# Altium PCB Digital_Encoder_Layout_V2.1.PcbDoc
Units mil, origin at the board's own origin, x right, y up, seen from the top; angles counter-clockwise.
Board outline 1220.47 x 1233.89 mil, 2 copper layers (Top Layer, Bottom Layer); 14 components, 11 nets, 51 pads, 14 vias.
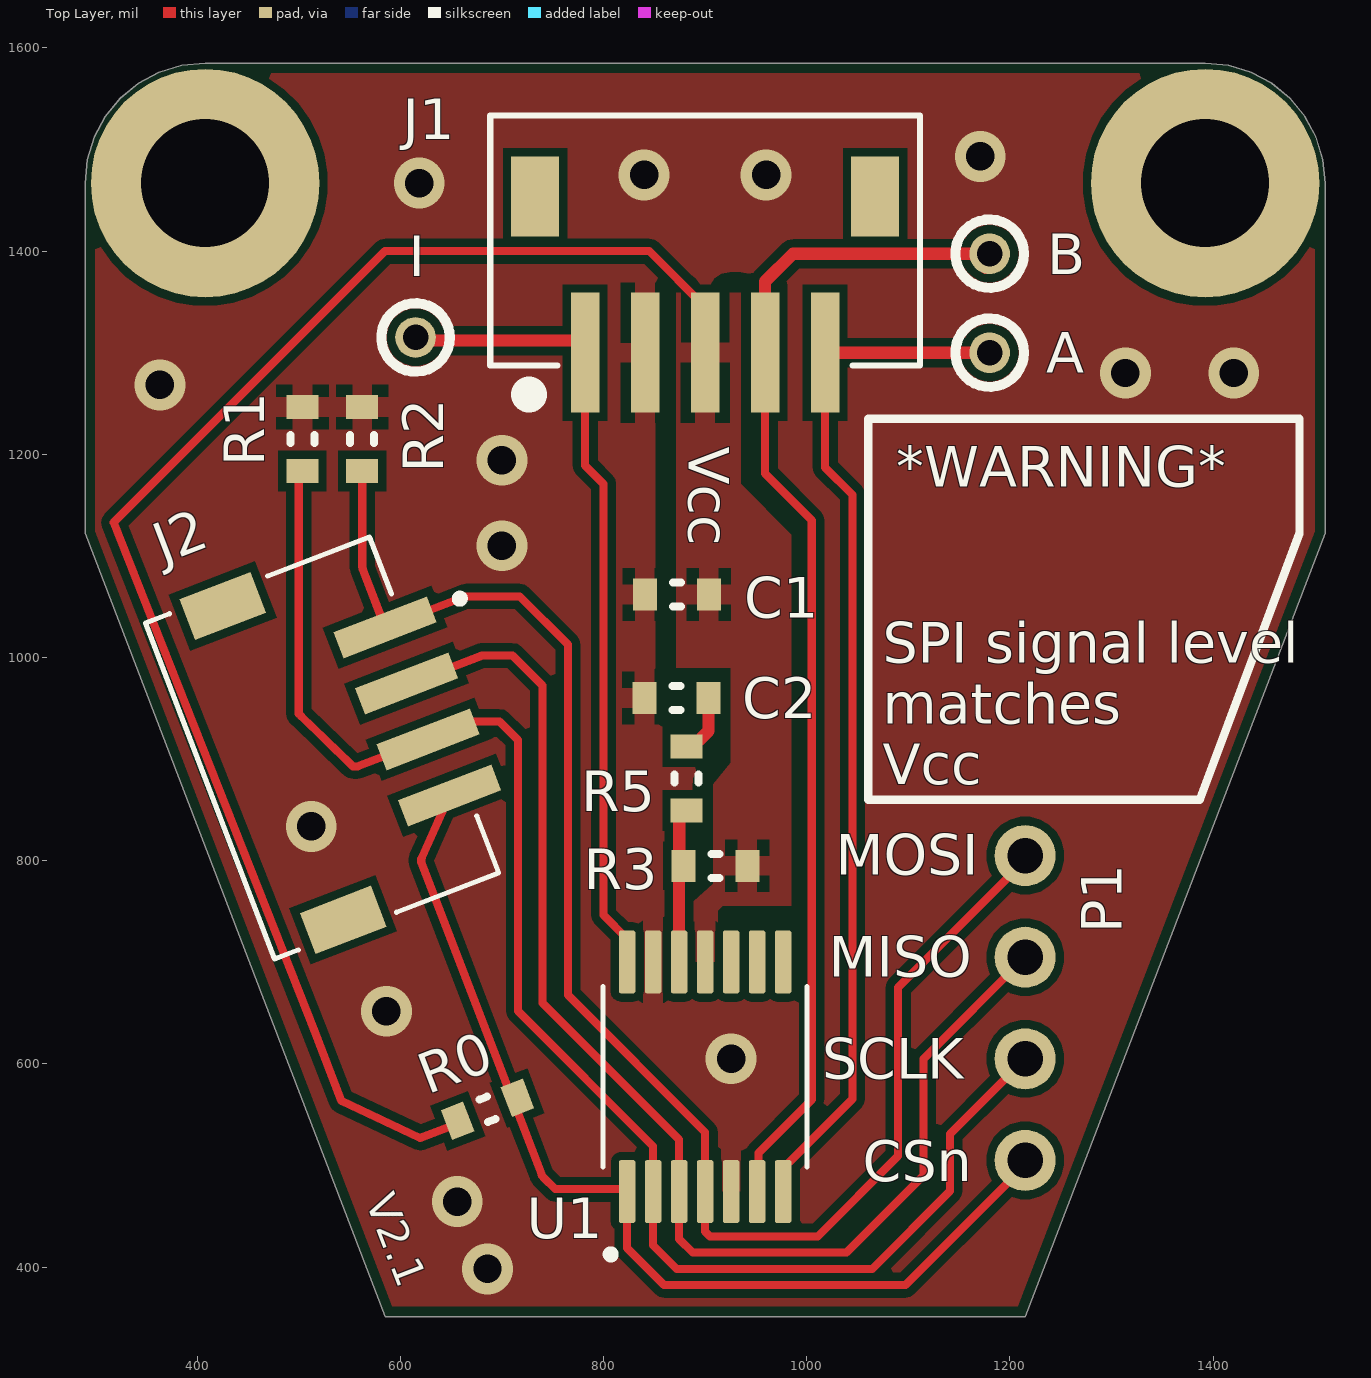
[diagram p0: Top Layer view]
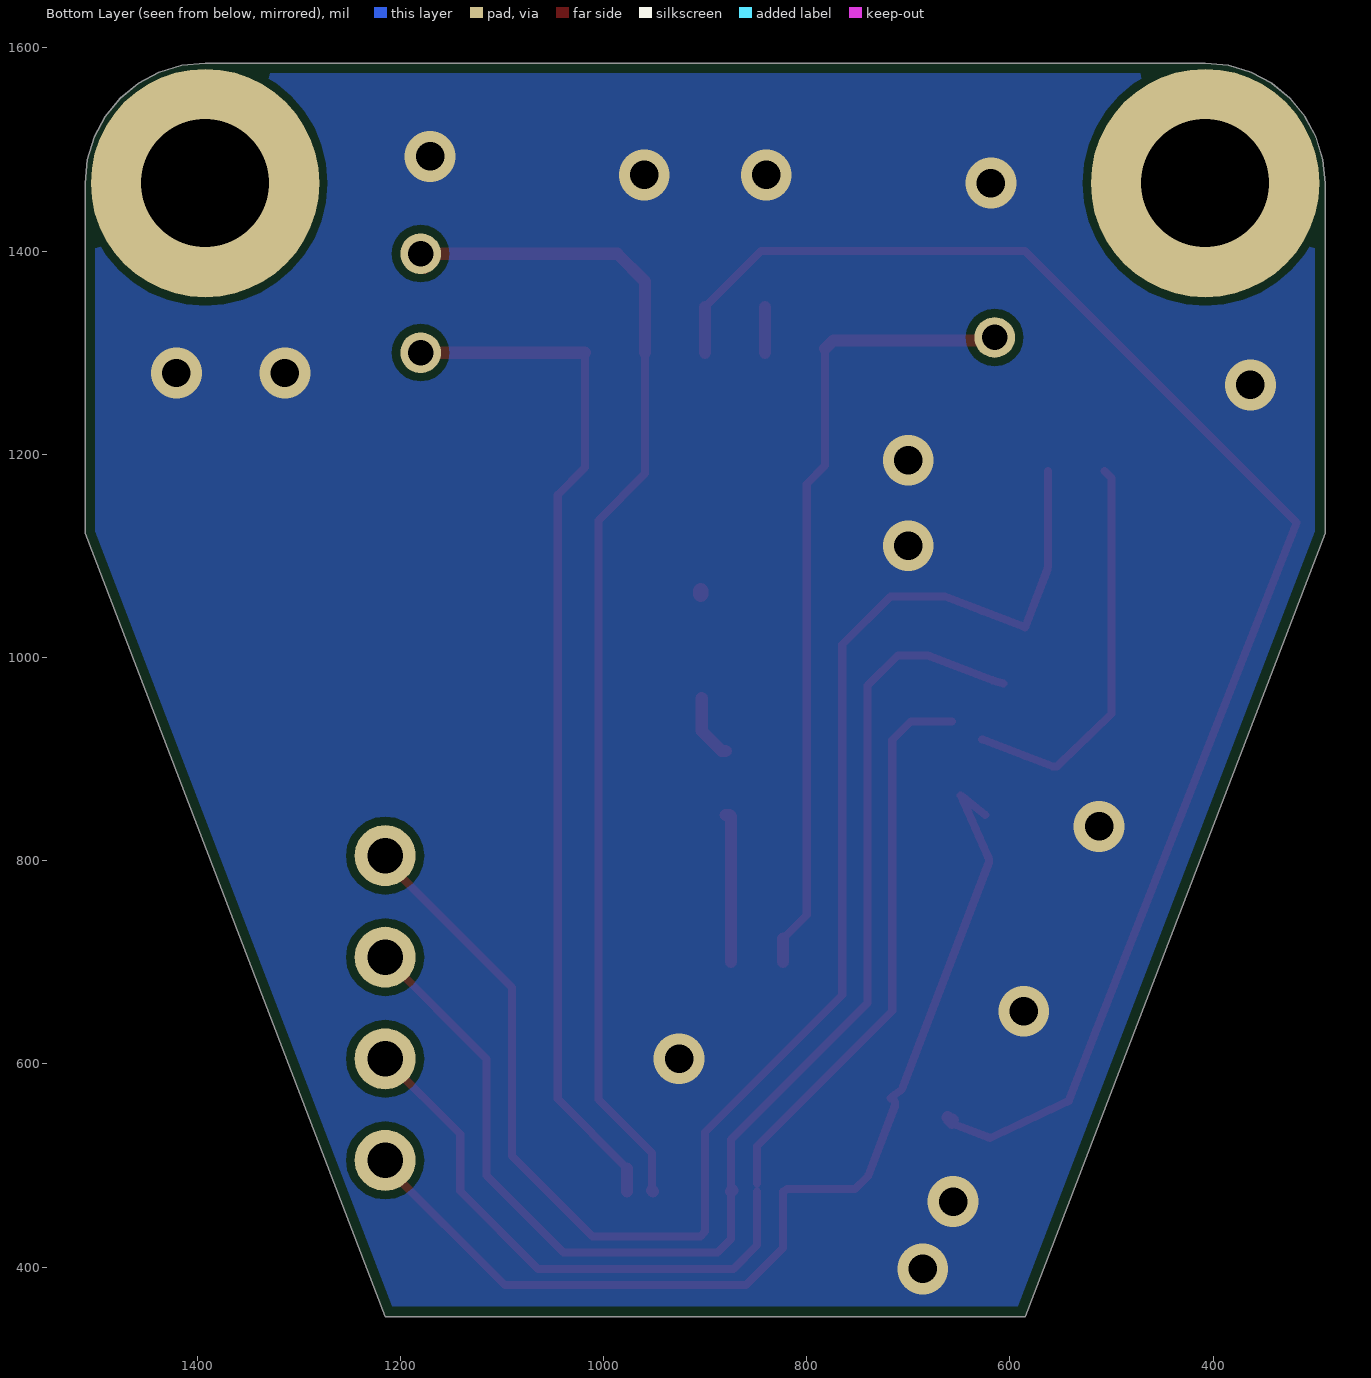
[diagram p1: Bottom Layer view, seen from below]

## Layer stack, top to bottom
Top Solder: solder mask 0.4, Solder Resist, Dk 3.5
Top Layer: signal copper 1.4
Dielectric 1: dielectric 12.6, FR-4, Dk 4.8
Bottom Layer: signal copper 1.4
Bottom Solder: solder mask 0.4, Solder Resist, Dk 3.5

## Board outline
407.87,1585 384.83,1582.73 362.68,1576.01 342.26,1565.09 324.36,1550.41 309.67,1532.51 298.75,1512.09 292.03,1489.93 289.76,1466.89 289.76,1122.31 585.04,351.11 1214.96,351.11 1510.24,1122.31 1510.24,1466.89 1507.97,1489.93 1501.25,1512.09 1490.33,1532.51 1475.64,1550.41 1457.74,1565.09 1437.32,1576.01 1415.17,1582.73 1392.13,1585

## Design rules (kind name [scope] priority, off if disabled: settings)
BoardOutlineClearance [All] p1: gap=10 ignorepadtopadclearanceinfootprint=FALSE
Clearance Clearance_1 [InNet('5V_3v3_Sel') vs InNet('GND')] p1: gap=8 ignorepadtopadclearanceinfootprint=TRUE except(10: Arc-Text Track-Text SMDPad-Text THPad-Text Via-Text Fill-Text Poly-Text Region-Text Text-Text; 20: Fill-Fill Fill-Poly Fill-Region Poly-Poly Poly-Region Region-Region)
Clearance "Clearance Bottom Layer" [OnLayer('Bottom Layer')] p2: gap=8 ignorepadtopadclearanceinfootprint=TRUE except(10: Arc-Text Track-Text SMDPad-Text THPad-Text Via-Text Fill-Text Poly-Text Region-Text Text-Text)
Clearance "Clearance Top Layer" [OnLayer('Top Layer')] p3: gap=8 ignorepadtopadclearanceinfootprint=TRUE except(10: Arc-Text Track-Text SMDPad-Text THPad-Text Via-Text Fill-Text Poly-Text Region-Text Text-Text)
HoleSize [All] p1: absolutevalues=TRUE maxlimit=248.03 minlimit=7.87 maxpercent=80.000 minpercent=20.000
MinimumAnnularRing [All] p1: minimumring=3
MinimumSolderMaskSliver [All] p1: minsoldermaskwidth=3.94
PolygonConnect PolygonConnect_5 [All vs IsNamedPolygon('3V3_L01_P007')] p1: thpad.connectstyle=Direct thpad.reliefconductorwidth=10 thpad.reliefentries=4 thpad.polygonreliefangle="90 Angle" thpad.airgapwidth=10 smdpad.connectstyle=Direct smdpad.reliefconductorwidth=10 smdpad.reliefentries=4 smdpad.polygonreliefangle="90 Angle" smdpad.airgapwidth=10 via.connectstyle=Relief via.reliefconductorwidth=10 via.reliefentries=4 via.polygonreliefangle="90 Angle" via.airgapwidth=10
PolygonConnect PolygonConnect_4 [All vs IsNamedPolygon('3V3_L01_P006')] p2: thpad.connectstyle=Relief thpad.reliefconductorwidth=10 thpad.reliefentries=4 thpad.polygonreliefangle="90 Angle" thpad.airgapwidth=10 smdpad.connectstyle=Direct smdpad.reliefconductorwidth=10 smdpad.reliefentries=4 smdpad.polygonreliefangle="90 Angle" smdpad.airgapwidth=10 via.connectstyle=Relief via.reliefconductorwidth=10 via.reliefentries=4 via.polygonreliefangle="90 Angle" via.airgapwidth=10
PolygonConnect PolygonConnect_3 [All vs IsNamedPolygon('3V3_L01_P005')] p3: thpad.connectstyle=Relief thpad.reliefconductorwidth=10 thpad.reliefentries=4 thpad.polygonreliefangle="90 Angle" thpad.airgapwidth=10 smdpad.connectstyle=Direct smdpad.reliefconductorwidth=10 smdpad.reliefentries=4 smdpad.polygonreliefangle="90 Angle" smdpad.airgapwidth=10 via.connectstyle=Relief via.reliefconductorwidth=10 via.reliefentries=4 via.polygonreliefangle="90 Angle" via.airgapwidth=10
PolygonConnect PolygonConnect_2 [All vs IsNamedPolygon('3V3_L01_P003')] p4: connectstyle=Direct reliefconductorwidth=10 reliefentries=4 polygonreliefangle="90 Angle" airgapwidth=10
PolygonConnect [All vs IsNamedPolygon('3V3_L01_P002')] p5: thpad.connectstyle=Direct thpad.reliefconductorwidth=10 thpad.reliefentries=4 thpad.polygonreliefangle="90 Angle" thpad.airgapwidth=10 smdpad.connectstyle=Direct smdpad.reliefconductorwidth=10 smdpad.reliefentries=4 smdpad.polygonreliefangle="90 Angle" smdpad.airgapwidth=10 via.connectstyle=Relief via.reliefconductorwidth=10 via.reliefentries=4 via.polygonreliefangle="90 Angle" via.airgapwidth=10
PolygonConnect PolygonConnect_1 [All] p6: thpad.connectstyle=Relief thpad.reliefconductorwidth=20 thpad.reliefentries=4 thpad.polygonreliefangle="90 Angle" thpad.airgapwidth=10 smdpad.connectstyle=Relief smdpad.reliefconductorwidth=20 smdpad.reliefentries=4 smdpad.polygonreliefangle="90 Angle" smdpad.airgapwidth=10 via.connectstyle=Direct via.reliefconductorwidth=20 via.reliefentries=4 via.polygonreliefangle="90 Angle" via.airgapwidth=10
RoomDefinition Digital_Encoder_Breakout [InComponentClass('Digital_Encoder_Breakout')] p1: confinementstyle=ConfineIn formatcopy=TRUE lockcomponents=FALSE outline 0,0 2000,0 2000,1960 0,1960
RoutingCorners [All] p1: cornerstyle=Round minsetback=100 maxsetback=100
RoutingVias [All] p1: holewidth=19.68 width=39.37 viastyle="Through Hole" minholewidth=7.87 minwidth=17.72 maxholewidth=39.37 maxwidth=78.74
SilkToSilkClearance [All] p1: silktosilkclearance=3.94
SilkToSolderMaskClearance [IsPad] p1: minsilkscreentomaskgap=3.94 clearancetoexposedcopper=TRUE
SolderMaskExpansion [All] p1: expansion=4 istentingtop=FALSE
Width [All] p1: maxlimit=100 minlimit=3.5 preferedwidth=15
25 further rules are at their usual default settings.

## Components (designator, comment, footprint, x,y, rotation, side; value= is the part's Value field where it differs from the comment)
A "Test Point (Via)" TP 1180,1300 r0 top
B "Test Point (Via)" TP 1180,1397.43 r90 top
C1 "0.10uF" 0603#1 872.13,1061.9 r0 top
C2 "1.0uF" 0603#1 871.81,960 r180 top
I "Test Point (Via)" TP 615,1315 r90 top
J1 "S5B-ZR-SM4A-TF (LF) (SN)" JST_S5B-ZR-SM4A-TF 781.89,1300 r0 top
J2 "S4B-ZR-SM4A-TF(LF)(SN)" JST_S4B-ZR-SM4A-TF(LF)(SN) 616.75,946.95 r291 top
P1 "POGO 4 PIN THRU" "POGO 4 PIN THRU" 1215,505 r90 top
R0 "4.7k" 0603#2 685.8,555.25 r201 top
R1 "4.7k" 0603#2 503.57,1215 r90 top
R2 "4.7k" 0603#2 562.47,1215 r90 top
R3 "JUMPER" 0603#1 910,795 r180 top value=0
R5 "JUMPER" 0603#1 881.89,880.89 r90 top value=0
U1 "AS5047U" AS5047U 900,587.33 r90 top

## Footprints (in the part's own frame and the unit in brackets; to place one, negate y for a bottom-side part, rotate by r counter-clockwise, add the part's x,y. Pads: shape width x height; smd on the part's side, far side on the other; paste and mask are expansions set on the pad)
0603#1 [mm] "Chip Resistor, 2-Leads, Body 1.60x0.80mm, IPC High Density"
  rect 0.6x0.8 smd mask+0.1: 1(-0.8,0) 2(0.8,0)
  silkscreen extent -0.1,-0.3 0.1,0.3, body extent -0.8,-0.4 0.8,0.4, height 0.6
0603#2 [mm] "Chip Resistor, 2-Leads, Body 1.60x0.80mm, IPC High Density"
  rect 0.6x0.8 smd: 1(-0.8,0) 2(0.8,0)
  silkscreen extent -0.1,-0.3 0.1,0.3, body extent -0.8,-0.4 0.8,0.4, height 0.6
AS5047U [mm]
  rrect25% 1.57x0.41 smd: 1(-2.87,1.95) 2(-2.87,1.3) 3(-2.87,0.65) 4(-2.87,0) 5(-2.87,-0.65) 6(-2.87,-1.3) 7(-2.87,-1.95) 8(2.87,-1.95) 9(2.87,-1.3) 10(2.87,-0.65) 11(2.87,0) 12(2.87,0.65) 13(2.87,1.3) 14(2.87,1.95)
  silkscreen extent -4.54,-2.55 2.25,2.55
JST_S4B-ZR-SM4A-TF(LF)(SN) [mm]
  rect 0.7x2.5 smd: 1(-2.25,0) 2(-0.75,0) 3(0.75,0) 4(2.25,0)
  rect 1.1x1.9 smd: S1(-4.2,-3.6) S2(4.2,-3.6)
  silkscreen extent -4.5,-5.55 4.5,2.1, body extent -4.53,-5.59 4.47,0.91, height 3.7
JST_S5B-ZR-SM4A-TF [mil]
  rect 28x118 smd paste+0: 1(0,0) 2(59.06,0) 3(118.11,0) 4(177.17,0) 5(236.22,0)
  rect 47x79 smd: 6(-49.21,153.62) 7(285.43,153.62)
  silkscreen extent -93,-41 330,233, body extent -88,-28 325,228, height 146
"POGO 4 PIN THRU" [mil]
  round 60 hole 35.04: 1(0,0) 2(100,0) 3(200,0) 4(300,0)
TP [mil] "Test point (40mil Standard)"
  round 40 hole 25: 1(0,0)

## Part data
C1: library part "CAP 0.10uF 16V", "CAP CER 0.10UF 16V X5R 0603/0805", Operating Temperature="-55°C ~ 85°C", Package=0603/0805, Rating=16V, Temperature Coefficient=X5R, Tolerance=10%
C2: library part "CAP 1.0uF 16V", "CAP CER 1.0UF 16V X5R 0603/0805", Operating Temperature="-55°C ~ 85°C", Package=0603/0805, Rating=16V, Temperature Coefficient=X5R, Tolerance=10%
J1: library part "CN 5POS JST ZR RA", "Connector Header Surface Mount, Right Angle 5 position 0.059\" (1.50mm)", Mfr_Name=JST, Supplier Part Number 1=455-1696-1-ND, Copyright="Copyright (C) 2021 Ultra Librarian. All rights reserved.", Digi-Key_Part_Number_1=455-1696-2-ND, Digi-Key_Part_Number_2=455-1696-1-ND, Digi-Key_Part_Number_3=455-1696-6-ND, Manufacturer_Part_Number="S5B-ZR-SM4A-TF (LF) (SN)", RefDes=RefDes, Supplier 1=Digi-Key, Type=DEV
J2: "Connector Header Surface Mount, Right Angle 4 position 0.059 (1.50mm)", Package=None, Arrow_Electronics-Purchase-URL=https://snapeda.com/shop?store=Arrow+Electronics&id=449060, Availability=Unavailable, MF="JST Sales", MP=S4B-ZR-SM4A-TF(LF)(SN), Price=None, SnapEDA_Link=https://www.snapeda.com/parts/S4B-ZR-SM4A-TF(LF)(SN)/JST%20Sales%20America%20Inc./view-part/449060/?ref=snap
P1: "4 pin POGO Holes 0.100\" Pitch", ComponentLink1Description="POGO Pins", ComponentLink1URL=https://www.digikey.ca/en/products/detail/mill-max-manufacturing-corp/816-22-004-10-001101/6149707?utm_adgroup=Rectangular%20Connectors%20-%20Spring%20Loaded&utm_source=google&utm_medium=cpc&utm_campaign=Shopping_Product_Connectors%2C%20Interconnects&utm_term=&productid=6149707&gclid=CjwKCAjwyIKJBhBPEiwAu7zllx5RKB49Aiz1Tcq0lCLtxeAJbHB79ZaevgMe56kl4rzAjPwbrhvRoBoC1QsQAvD_BwE
R0 R1 R2: library part "RES 4.7k 1/8W - 5%", "RES SMD 4.7k OHM 5% 1/8W 0805", Package=0805, Power (Watts)=0.125W, Tolerance=5%
R3 R5: library part "RES 0 JUMPER", "RES SMD 0 OHM JUMPER GENERIC 0805/0603", Package=0805
U1: "14-Bit On-Axis Magnetic Rotary Position Sensor with Up to 14-Bit Binary Incremental Pulse Count", Supplier Part Number 1=2009466, Supplier 1=RSComponents

## Free pads (board coordinates)
  round 225 hole 125.98: 1(407.87,1466.89) 1(1392.13,1466.89)
  round 225 / inner round 60 / far side round 60 hole 125.98: 5(407.87,1466.89)

## Via types
v1: diameter 50, hole 28, Top Layer to Bottom Layer, 14 vias

## Nets (pads, with @x,y where several pads share a name; then routed paths per layer and width w, separated by ;. In a path a pad name is that pad's centre, name@x,y a point inside that pad or via, vN(x,y) a via of type N, cw(c..) or ccw(c..) an arc to the next point about the centre after c; other vN are vias at no path point)
5V_3v3_Sel: C1.2 J1.3 R0.2 R3.1 U1.11 | length 1515.9
  Top Layer w8: R0.2@661.48,543.22 619.39,527.06 541.97,563.62 515.1,633.17 317.83,1132.83 585,1400 845,1400 J1.3@900,1345
  Top Layer w12: R0.2@657.08,541.93 656,544.74 R0.2@661.19,547.43 ; J1.3 J1.3@900,1345
  Top Layer w15: C1.2@904.25,1061.9 C1.2@904.25,1065.83
A: A.1 J1.5 U1.7 | length 1026.9
  Top Layer w8: U1.7@976.77,497.17 1045,565.4 1045,1160.19 1018.11,1187.08 J1.5
  Top Layer w12: U1.7 U1.7@976.77,497.17 ; J1.5 A.1
B: B.1 J1.4 U1.6 | length 1171.2
  Top Layer w8: U1.6@952.39,475.55 952.39,512.38 1005,564.99 1005,1135 959.06,1180.94 J1.4
  Top Layer w12: U1.6 U1.6@952.39,475.55 ; J1.4 959.06,1369.98 986.51,1397.43 1162.33,1397.43 B.1@1176.21,1383.55
CSn: J2.4 P1.1 R0.1 U1.1 | length 1044.5
  Top Layer w8: J2.4@624.26,844.98 624.61,845.26 J2.4 621.34,803.26 620.64,801.71 620.64,798.52 706.61,574.58 715.93,567.49 R0.1@717.6,566.22 ; R0.1 713.83,563.46 713.14,561.9 713.14,558.72 739.1,491.08 739.71,489.49 740.92,488.29 752.48,476.73 819.16,476.73 U1.1 823.23,418.66 859.65,382.24 1097.24,382.24 1215,500 P1.1
GND: C1.1 C2.2 J1.2 R1.2 R2.2 U1.5 U1.13 | length 45
  Top Layer w12: J1.2 J1.2@840.94,1345
  other v1: 685.8,398.24 656,464.49 925.59,605 586.36,651.88 512.24,833.75 700,1110 700,1194.04 363.33,1268.31 1313.63,1280 1420.34,1280 618.69,1466.89 839.93,1475 960,1475 1170.75,1493.12
I: I.1 J1.1 U1.14 | length 787
  Top Layer w8: J1.1 781.89,1188.97 800,1170.86 800,746.39 U1.14@823.23,723.16
  Top Layer w12: I.1@615,1311.9 773.89,1311.9 J1.1@781.89,1303.9 ; U1.14 U1.14@823.23,723.16
MISO: J2.2 P1.3 U1.3 | length 1286.5
  Top Layer w8: J2.2 616.72,977.48 617.08,977.58 680.66,1001.98 710.4,1001.98 740,972.38 740,660 874.41,525.59 874.41,476.95 U1.3@873.1,475.65 ; U1.3 874.41,427.65 887.82,414.24 1039.24,414.24 1115,490 1115,605 P1.3
  Top Layer w12: U1.3@873.1,475.65 U1.3
MOSI: J2.1 P1.4 R2.1 U1.4 | length 1569.1
  Top Layer w8: R2.1 562.47,1089.82 563,1086.95 581.5,1038.78 J2.1 627.21,1045.85 664.46,1060.15 717.58,1060.15 765,1012.73 765,667.72 900,532.72 900,434.94 904.69,430.26 1010.9,430.26 1090,509.36 1090,675 1215,800 P1.4
NetC2_1: C2.1 R5.2 | length 64.1
  Top Layer w12: R5.2@879.69,907.99 883.62,907.99 903.31,927.68 C2.1
SCLK: J2.3 P1.2 R1.1 U1.2 | length 1500
  Top Layer w8: R1.1@506.88,1183.5 500,1176.63 500,947.9 500,944.59 502.44,942.15 551.1,895.08 553.42,892.82 558.14,892.82 585.12,903.18 J2.3 ; J2.3@657.05,937.02 697.57,937.02 715.82,918.77 715.82,651.88 848.82,518.88 U1.2@848.82,482.41 ; U1.2 848.82,421.52 872.1,398.24 1064.45,398.24 1141,474.79 1141,531 P1.2
VDD3V3: R3.2 R5.1 U1.12 | length 149
  Top Layer w12: U1.12 R3.2@874.41,794.73 ; R3.2@874.56,794.73 874.56,843.58 875.98,845 R5.1@879.69,845
pads on no net: J1.6 J1.7 J2.S1 J2.S2 U1.8 U1.9 U1.10

## Polygon pours and split planes (outlines as drawn)
GND on Top Layer "GND_L01_P049" (solid, pour order 49): 1621.72,335 295,335 215,335 215,445 215,1640 1590,1640 1629.16,1640
5V_3v3_Sel on Top Layer "Top Layer-5V_3v3_Sel" (solid, pour order 48): 888.16,759.49 888.75,669.42 912.54,669.42 912.54,750.92 917.52,755.46 984.84,755.46 984.84,779.12 984.84,1120.61 935,1170.86 935,1359 871.81,1359 871.81,1258.19 871.81,990 925,990 925,896.18 908.07,875.47 908.07,777.17
GND on Bottom Layer "GND_L02_P001" (solid, pour order 1): 0,1695 0,155 2280,155 2280,1725

## Silkscreen, mask and mechanical layers (free items; w line width, h text height)
Top Overlay:
  circle w10: c1180,1300 r33.7
  circle w10: c615,1315 r33.7
  circle w10: c1180,1397.43 r33.7
  lines w8: 1060.54,860 1060.54,1235 1485,1235 1485,1122.31 1386.87,860 1060.54,860
  text "Vcc" at 884,1207.43 h40 r270
  text "*WARNING*" at 1088,1168 h40
  text "SPI signal level  / matches  / Vcc" at 1075,875 h40
  text "MOSI" at 1028.4,786.38 h40
  text "MISO" at 1021.74,685.8 h40
  text "SCLK" at 1015.07,585.22 h40
  text "CSn" at 1055.06,484.64 h40
  text "V2.1" at 565.34,465.4 h30 r291
Mechanical 1:
  the board outline again, w10

## Dimensions
1067.32,1453.62 to 1392.13,1466.89 on Dimensions
407.87,1466.89 to 732.68,1453.62 on Dimensions
407.87,1466.89 to 1392.13,1466.89 on Dimensions
1392.13,1466.89 to 900,587.33 on Dimensions